# Altium PCB SD-FS-XMK01D-(20201205).PcbDoc
Units mm, origin at the board's own origin, x right, y up, seen from the top; angles counter-clockwise.
Board outline 24.5 x 92.65 mm, 2 copper layers (Top Layer, Bottom Layer); 23 components, 51 nets, 77 pads, 21 vias.
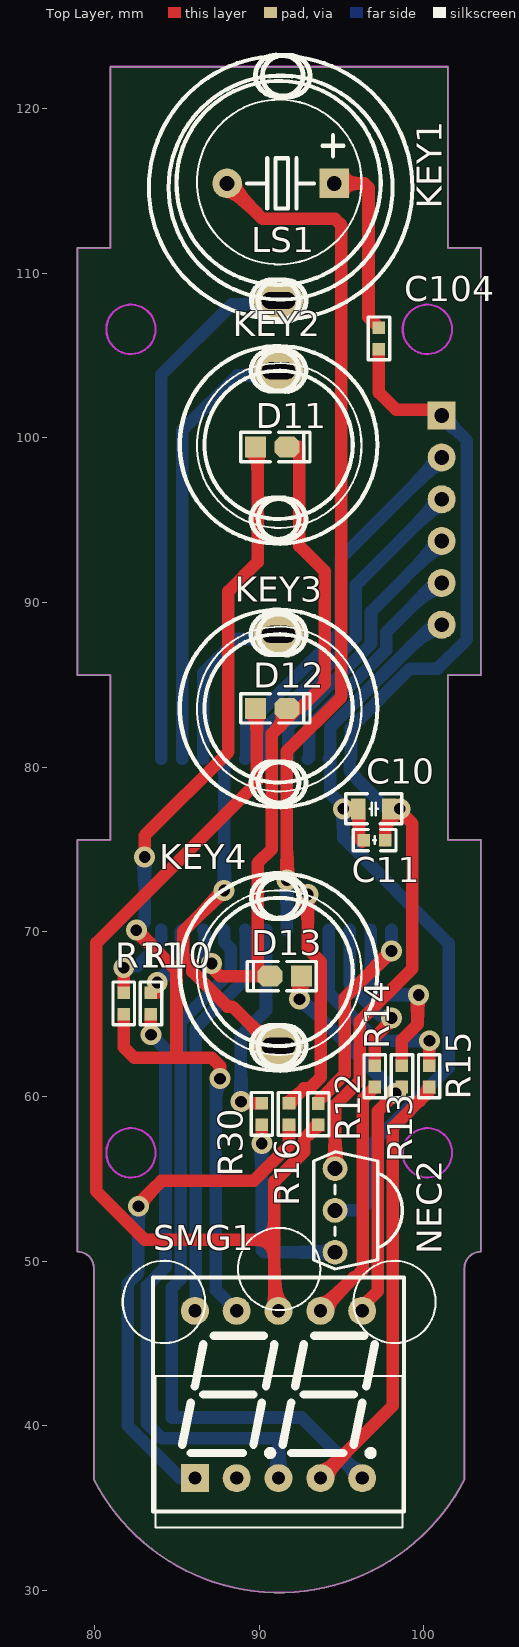
[diagram p0: Top Layer view]
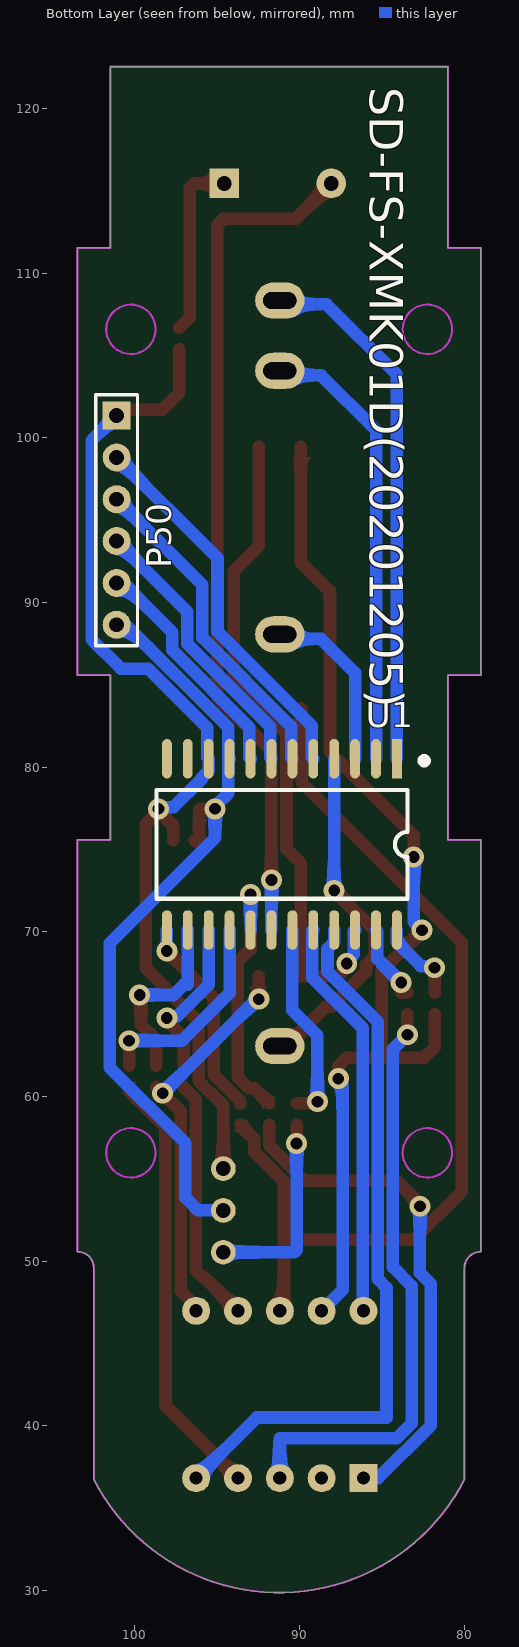
[diagram p1: Bottom Layer view, seen from below]

## Layer stack, top to bottom
Top Solder: solder mask 0.0102, Solder Resist, Dk 3.5
Top Layer: signal copper 0.0356
Dielectric 1: dielectric 0.32, FR-4, Dk 4.8
Bottom Layer: signal copper 0.0356
Bottom Solder: solder mask 0.0102, Solder Resist, Dk 3.5

## Board outline
79.974,36.744 79.974,49.583 ccw(c78.974,49.583) 78.974,50.583 78.974,75.583 80.974,75.583 80.974,85.583 78.974,85.583 78.974,111.529 80.974,111.529 80.974,122.529 101.474,122.529 101.474,111.529 103.474,111.529 103.474,85.583 101.474,85.583 101.474,75.583 103.474,75.583 103.474,50.583 ccw(c103.474,49.583) 102.474,49.583 102.474,36.744 cw(c91.224,42.529)

## Design rules (kind name [scope] priority, off if disabled: settings)
Clearance [All] p1: gap=0.152 ignorepadtopadclearanceinfootprint=FALSE
ComponentClearance [All] p1 off: gap=0 collisioncheckmode=3 verticalgap=2540 showdistances=FALSE
Height [All] p1: minheight=0 maxheight=25.4 prefheight=0.025
HoleSize [All] p1: absolutevalues=TRUE maxlimit=2.54 minlimit=0.305 maxpercent=80.000 minpercent=20.000
PolygonConnect [All] p1: connectstyle=Relief reliefconductorwidth=0.254 reliefentries=4 polygonreliefangle="90 Angle" airgapwidth=0.254
RoutingVias [All] p1: holewidth=0.711 width=1.27 viastyle="Through Hole" minholewidth=0.711 minwidth=1.27 maxholewidth=0.711 maxwidth=1.27
SilkToSilkClearance [All] p1: silktosilkclearance=0
SilkToSolderMaskClearance [IsPad] p1: minsilkscreentomaskgap=0 clearancetoexposedcopper=TRUE
SolderMaskExpansion [All] p1: expansion=0.102
Width [All] p1: maxlimit=1.27 minlimit=0.381 preferedwidth=0.762
25 further rules are at their usual default settings.

## Components (designator, comment, footprint, x,y, rotation, side; value= is the part's Value field where it differs from the comment)
C10 "Cap" "C 0805_L" 96.967,77.47 r0 top value=10uF
C11 "Cap" "C 0603_L" 97.013,75.565 r0 top value=0.1uF
C104 "Res2" "R 0603_L" 97.282,106.03 r270 top value=4.7K (schematic designator R50)
D11 "LED0" "LED 0805L" 91.186,99.441 r0 top
D12 "LED0" "LED 0805L" 91.186,83.566 r0 top
D13 "LED0" "LED 0805L" 91.186,67.31 r180 top
KEY1 "TOUCH" "KEY-T9-2 - 13.6" 91.313,115.189 r180 top
KEY2 "TOUCH" KEY-T9-2 91.186,99.568 r0 top
KEY3 "TOUCH" KEY-T9-2 91.186,83.566 r0 top
KEY4 "TOUCH" KEY-T9-2 91.186,67.564 r180 top
LS1 "Speaker" "BEEP 6.5x12x6" 91.313,115.443 r90 top
NEC2 "JSI838" HS0038B 94.615,53.086 r90 top
P50 "主板电源接口" HDR2.54-LI-6P 101.092,94.996 r270 bottom
R10 "Res2" "R 0603_L" 83.439,65.659 r90 top value=201
R11 "Res2" "R 0603_L" 81.788,65.659 r90 top value=201
R12 "Res2" "R 0603_L" 93.599,58.928 r90 top value=201
R13 "Res2" "R 0603_L" 98.679,61.229 r90 top value=201
R14 "Res2" "R 0603_L" 97.028,61.229 r90 top value=201
R15 "Res2" "R 0603_L" 100.33,61.229 r90 top value=201
R16 "Res2" "R 0603_L" 91.821,58.943 r90 top value=201
R30 "Res2" "R 0603_L" 90.17,58.943 r90 top value=1K
SMG1 "3621A" "SMG 0.36-2P" 91.186,41.91 r0 top
U1 "YX23F01CB_24" SOP24_M 91.059,75.311 r270 bottom

## Footprints (in the part's own frame and the unit in brackets; to place one, negate y for a bottom-side part, rotate by r counter-clockwise, add the part's x,y. Pads: shape width x height; smd on the part's side, far side on the other; paste and mask are expansions set on the pad)
"BEEP 6.5x12x6" [mm] "6.5*12*6mm(脚距,直径,高度)"
  rect 1.8x1.8 hole 0.9: 1(0,-3.25)
  round 1.8 hole 0.9: 2(0,3.25)
  silkscreen extent -6.17,-6.07 6.22,6.33, body extent -6,-6 6,6, height 6.05
"C 0603_L" [mil] "无极性贴片电容"
  rect 30x30 smd: 1(-25.59,0) 2(25.59,0)
  silkscreen extent -51,-26 51,26, body extent -31,-16 31,16, height 32
"C 0805_L" [mil] "无极性贴片电容                    @sucaita.com 素材塔"
  rect 35x50 smd: 1(-37.4,0) 2(37.4,0)
  silkscreen extent -67,-36 67,36, body extent -39,-24 39,24, height 20
HDR2.54-LI-6P [mm] "排针，6脚"
  rect 1.7x1.7 hole 0.9: 1(-6.35,0)
  round 1.7 hole 0.9: 2(-3.81,0) 3(-1.27,0) 4(1.27,0) 5(3.81,0) 6(6.35,0)
  silkscreen extent -7.62,-1.27 7.62,1.27, body extent -7.62,-1.27 7.62,1.27, height 8.5
HS0038B [mm] "红外接收头"
  round 1.5 hole 0.9: 1(-2.54,0) 2(0,0) 3(2.54,0)
  silkscreen extent -3.56,-4.08 3.56,1.3
KEY-T9-2 [mm]
  oval 3x2.2 hole 2.032 slot 1.016 at 90 deg: 1(0,4.5)
  silkscreen extent -6,-6 6,6
"KEY-T9-2 - 13.6" [mil]
  oval 118.11x86.61 hole 80 slot 40 at 90 deg: 1(5,270)
  silkscreen extent -315,-317 315,320
"LED 0805L" [mil] "白色0805LED                    @sucaita.com 素材塔"
  rect 50x50 smd: 1(-55,0)
  oct 60x50 smd: 2(20,0)
  silkscreen extent -90,-35 75,35, body extent -54,-25 24,25, height 32
"R 0603_L" [mil] "1/10W贴片电阻"
  rect 30x30 smd: 1(-25.59,0) 2(25.59,0)
  silkscreen extent -51,-26 51,26, body extent -31,-16 32,16, height 16
"SMG 0.36-2P" [mm] "15*14*7.2mm(长宽厚)"
  rect 1.7x1.7 hole 0.8: 1(-5.08,-5.08)
  round 1.7 hole 0.8: 2(-2.54,-5.08) 3(0,-5.08) 4(2.54,-5.08) 5(5.08,-5.08) 6(5.08,5.08) 7(2.54,5.08) 8(0,5.08) 9(-2.54,5.08) 10(-5.08,5.08)
  silkscreen extent -7.62,-7.11 7.62,7.11, body extent -7.5,-7 7.5,7, height 7.2
SOP24_M [mm] "15.4*10.6*2.6mm（长宽高）"
  rect 2.4x0.6 smd: 1(-5.2,6.985)
  oval 2.4x0.6 smd: 2(-5.2,5.715) 3(-5.2,4.445) 4(-5.2,3.175) 5(-5.2,1.905) 6(-5.2,0.635) 7(-5.2,-0.635) 8(-5.2,-1.905) 9(-5.2,-3.175) 10(-5.2,-4.445) 11(-5.2,-5.715) 12(-5.2,-6.985) 13(5.2,-6.985) 14(5.2,-5.715) 15(5.2,-4.445) 16(5.2,-3.175) 17(5.2,-1.905) 18(5.2,-0.635) 19(5.2,0.635) 20(5.2,1.905) 21(5.2,3.175) 22(5.2,4.445) 23(5.2,5.715) 24(5.2,6.985)
  silkscreen extent -5.23,-7.62 3.3,8.79, body extent -5.15,-7.7 5.15,7.7, height 2.7

## Part data
C10 C11: "Capacitor", LatestRevisionDate=17-Jul-2002, LatestRevisionNote="Re-released for DXP Platform.", PackageDescription="Radial Cap, Thru-Hole; 2 Leads; 0.3 in Pin Spacing", PackageReference=RAD-0.3, Published=8-Jun-2000, Publisher="Altium Limited"
C104 R10 R11 R12 R13 R14 R15 R16 R30: "Resistor", LatestRevisionDate=17-Jul-2002, LatestRevisionNote="Re-released for DXP Platform.", PackageDescription="Axial Device, Thru-Hole; 2 Leads; 0.4 in Pin Spacing", PackageReference=AXIAL-0.4, Published=8-Jun-2000, Publisher="Altium Limited"
D11 D12 D13: "Typical INFRARED GaAs LED", LatestRevisionDate=08-Jul-2005, LatestRevisionNote="Mech Layer 1 removed.", PackageDescription="LED; 2 Leads", PackageReference=LED-0, Published=8-Jun-2000, Publisher="Altium Limited"
KEY1 KEY2 KEY3 KEY4: "触摸弹簧"
LS1: "Loudspeaker", LatestRevisionDate=17-Jul-2002, LatestRevisionNote="Re-released for DXP Platform.", PackageReference=PIN2, Published=24-Mar-1999, Publisher="Altium Limited"
NEC2: library part HS0038, "红外接收器"
P50: library part "Header 6", "Header, 6-Pin", LatestRevisionDate=17-Jul-2002, LatestRevisionNote="Re-released for DXP Platform.", Publisher="Altium Limited"
SMG1: "0.36寸2位共阴数码管"
U1: "主控MCU"

## Via types
v1: diameter 1.27, hole 0.711, Top Layer to Bottom Layer, 21 vias

## Nets (pads, with @x,y where several pads share a name; then routed paths per layer and width w, separated by ;. In a path a pad name is that pad's centre, name@x,y a point inside that pad or via, vN(x,y) a via of type N, cw(c..) or ccw(c..) an arc to the next point about the centre after c; other vN are vias at no path point)
220VAC: 
A: R10.2 U1.23 | length 4.2
  Top Layer w0.762: R10.2 v1@83.824,66.309
  Bottom Layer w0.762: v1(83.82,66.929) 85.263,68.372 85.263,70.03 U1.23
B: R11.2 U1.24 | length 5.2
  Top Layer w0.762: R11.2 v1(81.788,67.818)
  Bottom Layer w0.762: v1(81.788,67.818) 81.885,67.915 82.616,67.915 84.074,69.373 U1.24
C: R12.2 U1.13 | length 12.4
  Top Layer w0.762: R12.2 93.599,59.736 95.199,61.337 95.199,65.989 v1(98.044,68.834)
  Bottom Layer w0.762: v1(98.044,68.834) U1.13
COM1: SMG1.10 U1.20 | length 24.4
  Bottom Layer w0.762: SMG1.10 86.15,47.034 86.15,64.154 89.205,67.209 89.205,70.06 U1.20
COM2: SMG1.5 U1.21 | length 44.3
  Bottom Layer w0.762: U1.21 87.884,69.373 88.29,68.967 88.29,67.588 85.236,64.533 85.236,48.914 84.709,48.387 84.709,40.513 92.583,40.513 SMG1.5
D: R13.2 U1.14 | length 11.2
  Top Layer w0.762: R13.2 98.679,63.446 99.622,64.389 99.622,66.094 v1(99.695,66.167)
  Bottom Layer w0.762: U1.14 96.774,66.802 97.018,66.802 97.653,66.167 v1(99.695,66.167)
DP/NTC: LS1.2 U1.18 | length 52.1
  Top Layer w0.762: LS1.2 90.222,113.284 94.615,113.284 94.996,112.903 94.996,84.272 91.694,80.97 v1(91.694,73.152)
  Bottom Layer w0.762: U1.18 v1(91.694,73.152)
DW1: P50.2 U1.5 | length 23.2
  Bottom Layer w0.762: U1.5 89.235,80.592 89.235,82.504 94.971,88.24 94.971,92.685 P50.2
DW2: P50.3 U1.6 | length 20.2
  Bottom Layer w0.762: U1.6 90.505,80.592 90.505,82.481 95.885,87.861 95.885,91.059 P50.3
DW3: P50.4 U1.7 | length 17.1
  Bottom Layer w0.762: U1.7 91.775,80.592 91.775,82.458 96.799,87.482 96.799,89.433 P50.4
E: R14.2 U1.15 | length 10
  Top Layer w0.762: R14.2 97.028,63.617 98.044,64.633 v1(98.044,64.77)
  Bottom Layer w0.762: U1.15 95.504,66.779 97.416,64.867 97.947,64.867 v1(98.044,64.77)
F: R15.2 U1.16 | length 12.6
  Top Layer w0.762: R15.2 100.33,63.373 v1(100.346,63.389)
  Bottom Layer w0.762: U1.16 94.234,66.294 97.139,63.389 v1(100.346,63.389)
G: R16.2 U1.17 | length 16.1
  Top Layer w0.762: R16.2 92.72,60.492 93.062,60.492 93.751,61.182 93.751,68.166 92.964,68.953 v1(92.964,72.263)
  Bottom Layer w0.762: U1.17 v1(92.964,72.263)
GND: C10.1 C11.1 NEC2.2 P50.6 U1.9 | length 48.6
  Top Layer w0.762: v1(95.123,77.47) C10.1 96.08,77.406 96.08,75.692 96.266,75.506 96.266,75.468 C11.1
  Bottom Layer w0.762: NEC2.2 96.139,53.086 96.923,53.87 96.923,57.171 101.514,61.762 101.514,69.301 95.123,75.692 v1(95.123,77.47) 95.123,77.607 94.315,78.416 94.315,80.43 U1.9 94.315,80.592 94.315,82.411 100.55,88.646 P50.6
LED_A: R10.1 SMG1.3 | length 36.5
  Top Layer w0.762: v1(83.439,63.754) R10.1
  Bottom Layer w0.762: v1(83.439,63.754) 84.321,62.872 84.321,49.642 83.185,48.505 83.185,40.155 84.097,39.243 91.186,39.243 SMG1.3
LED_B: D11.1 R11.1 SMG1.9 | length 65.1
  Top Layer w0.762: R11.1 81.788,62.992 82.423,62.357 85.217,62.357 ; v1(82.55,70.104) 84.988,67.666 84.988,62.586 85.217,62.357 ; v1(83.058,74.549) 83.058,75.842 88.138,80.922 88.138,90.678 89.916,92.456 D11.1@89.916,99.441 ; v1(87.63,61.087) 87.63,61.849 87.122,62.357 85.217,62.357
  Bottom Layer w0.762: v1(82.55,70.104) 83.058,70.612 v1(83.058,74.549) ; v1(87.63,61.087) 87.63,60.95 87.376,60.696 87.376,48.26 SMG1.9
LED_C: D12.1 R12.1 SMG1.8 | length 57.9
  Top Layer w0.762: D12.1@89.916,83.566 89.865,83.515 89.865,79.072 80.127,69.334 80.127,54.237 83.057,51.308 90.932,51.308 ; SMG1.8 90.932,47.244 90.932,51.308 ; R12.1 92.735,57.414 92.735,56.644 90.932,54.841 90.932,51.308
LED_D: D13.1 R13.1 SMG1.6 | length 24.2
  Top Layer w0.762: v1(92.456,65.913) D13.1@92.456,67.31 ; SMG1.6 96.266,47.244 97.213,48.191 97.213,59.113 v1(98.298,60.198) R13.1
  Bottom Layer w0.762: v1(92.456,65.913) 92.583,65.913 v1(98.298,60.198)
LED_DP: SMG1.2
LED_E: R14.1 SMG1.7 | length 15
  Top Layer w0.762: SMG1.7 95.758,49.022 95.852,49.022 96.299,49.468 96.299,59.85 R14.1
LED_F: R15.1 SMG1.4 | length 26.5
  Top Layer w0.762: SMG1.4 98.127,41.231 98.127,58.122 100.33,60.325 R15.1
  Bottom Layer w0.762: SMG1.4 SMG1.4@93.778,36.83
LED_G: R16.1 SMG1.1 | length 31
  Top Layer w0.762: v1(82.677,53.34) 82.677,53.477 84.074,54.874 89.672,54.874 91.821,57.023 R16.1
  Bottom Layer w0.762: v1(82.677,53.34) 82.677,49.291 82.017,48.63 82.017,40.03 85.217,36.83 SMG1.1
NEC_R: R30.2 U1.19 | length 12.4
  Top Layer w0.762: v1(88.9,59.69) 88.997,59.593 R30.2
  Bottom Layer w0.762: v1(88.9,59.69) 88.9,63.706 90.424,65.23 U1.19
NetC2_1: 
NetC3_1: 
NetC5_1: 
NetC5_2: 
NetD1_K: 
NetF2_1: 
NetLS1_1: C104.1 LS1.1 | length 11
  Top Layer w0.762: LS1.1 96.393,115.443 96.647,115.189 96.647,107.315 C104.1
NetNEC2_1: NEC2.1 R30.1 | length 12.5
  Top Layer w0.762: v1(90.17,57.15) R30.1
  Bottom Layer w0.762: v1(90.17,57.15) 90.17,50.673 90.297,50.546 NEC2.1@94.996,50.546
NetP01_1: 
NetP01_2: 
NetP01_3: 
NetP01_4: 
NetQ1_3: 
NetQ2_3: 
NetQ3_3: 
NetQ4_3: 
NetR2_1: 
NetR2_2: 
TOUCH1: KEY1.1 U1.1 | length 32.3
  Bottom Layer w0.762: U1.1 84.074,103.831 88.344,108.101 90.956,108.101 KEY1.1
TOUCH2: KEY2.1 U1.2 | length 27.3
  Bottom Layer w0.762: U1.2 85.344,100.457 88.68,103.793 90.911,103.793 KEY2.1
TOUCH3: KEY3.1 U1.3 | length 10.8
  Bottom Layer w0.762: U1.3 86.614,85.725 88.68,87.791 90.911,87.791 KEY3.1
TOUCH4: KEY4.1 U1.4 | length 21.3
  Top Layer w0.762: v1(87.884,72.517) 85.408,70.041 85.408,68.539 85.954,67.994 85.954,67.588 88.078,65.464 88.386,65.464 90.786,63.064 KEY4.1
  Bottom Layer w0.762: v1(87.884,72.517) U1.4
TOUCH_LED_COM: D11.2 D12.2 D13.2 U1.22 | length 40
  Top Layer w0.762: v1(87.122,68.072) 87.122,67.828 87.64,67.31 89.916,67.31 89.916,74.168 90.78,75.032 90.78,82.017 92.329,83.566 92.456,83.566 92.489,83.566 93.98,85.057 93.98,91.896 92.456,93.42 92.456,99.441
  Bottom Layer w0.762: U1.22 86.695,70.03 86.695,68.637 87.122,68.209 v1(87.122,68.072)
UART_RX: U1.12
UART_TX: U1.11
VCC: C10.2 C11.2 C104.2 NEC2.3 P50.1 U1.10 | length 64.1
  Top Layer w0.762: NEC2.3 94.615,59.459 96.114,60.958 96.114,64.562 99.314,67.762 99.314,76.571 v1@98.552,77.333 ; C104.2 97.282,102.743 98.337,101.688 100.75,101.688 P50.1 ; C11.2 97.663,76.444 v1@98.552,77.333 ; C10.2 v1(98.552,77.47) v1@98.552,77.333
  Bottom Layer w0.762: v1(98.552,77.47) 98.455,77.567 97.639,77.567 95.941,79.266 95.941,79.336 95.504,79.773 U1.10 95.585,80.592 95.585,82.388 99.176,85.979 100.838,85.979 102.616,87.757 102.616,99.822 P50.1
YAOTOU: P50.5 U1.8 | length 14.3
  Bottom Layer w0.762: U1.8 93.045,80.592 93.045,82.434 97.714,87.103 97.714,88.189 100.686,91.161 101.067,91.161 P50.5

## Keep-outs
Keep-Out Layer:
  circle w0.127: c82.224,56.583 r1.5
  circle w0.127: c82.224,106.583 r1.5
  circle w0.127: c100.224,106.583 r1.5
  circle w0.127: c100.224,56.583 r1.5
  lines w0.127: 78.974,50.583 cw(c78.974,49.583) 79.974,49.583 79.974,36.744 ccw(c91.224,42.529) 102.474,36.744 102.474,49.583 cw(c103.474,49.583) 103.474,50.583 103.474,75.583 101.474,75.583 101.474,85.583 103.474,85.583 103.474,111.529 101.474,111.529 101.474,122.529 80.974,122.529 80.974,111.529 78.974,111.529 78.974,85.583 80.974,85.583 80.974,75.583 78.974,75.583 78.974,50.583

## Silkscreen, mask and mechanical layers (free items; w line width, h text height)
Top Overlay:
  circle w0.127: c91.224,49.529 r2.5
  circle w0.127: c84.224,47.529 r2.5
  circle w0.127: c98.224,47.529 r2.5
  circle w0.127: c91.224,67.529 r5
  circle w0.127: c91.224,83.529 r5
  circle w0.127: c91.224,99.529 r5
  circle w0.127: c91.224,115.529 r5
  lines w0.127: 83.724,33.829 98.724,33.829 98.724,43.029 83.724,43.029 83.724,33.829
Bottom Overlay:
  text "SD-FS-XMK01D(20201205)" at 85.725,121.285 h2.03 r90